# Altium PCB PCB2.PcbDoc
Units mm, origin at the board's own origin, x right, y up, seen from the top; angles counter-clockwise.
Board outline 149.86 x 60.96 mm, 4 copper layers (Top Layer, Int1 (GND), Int2 (PWR), Bottom Layer), stack 1.369 mm thick; 18 components, 20 nets, 163 pads, 36 vias.
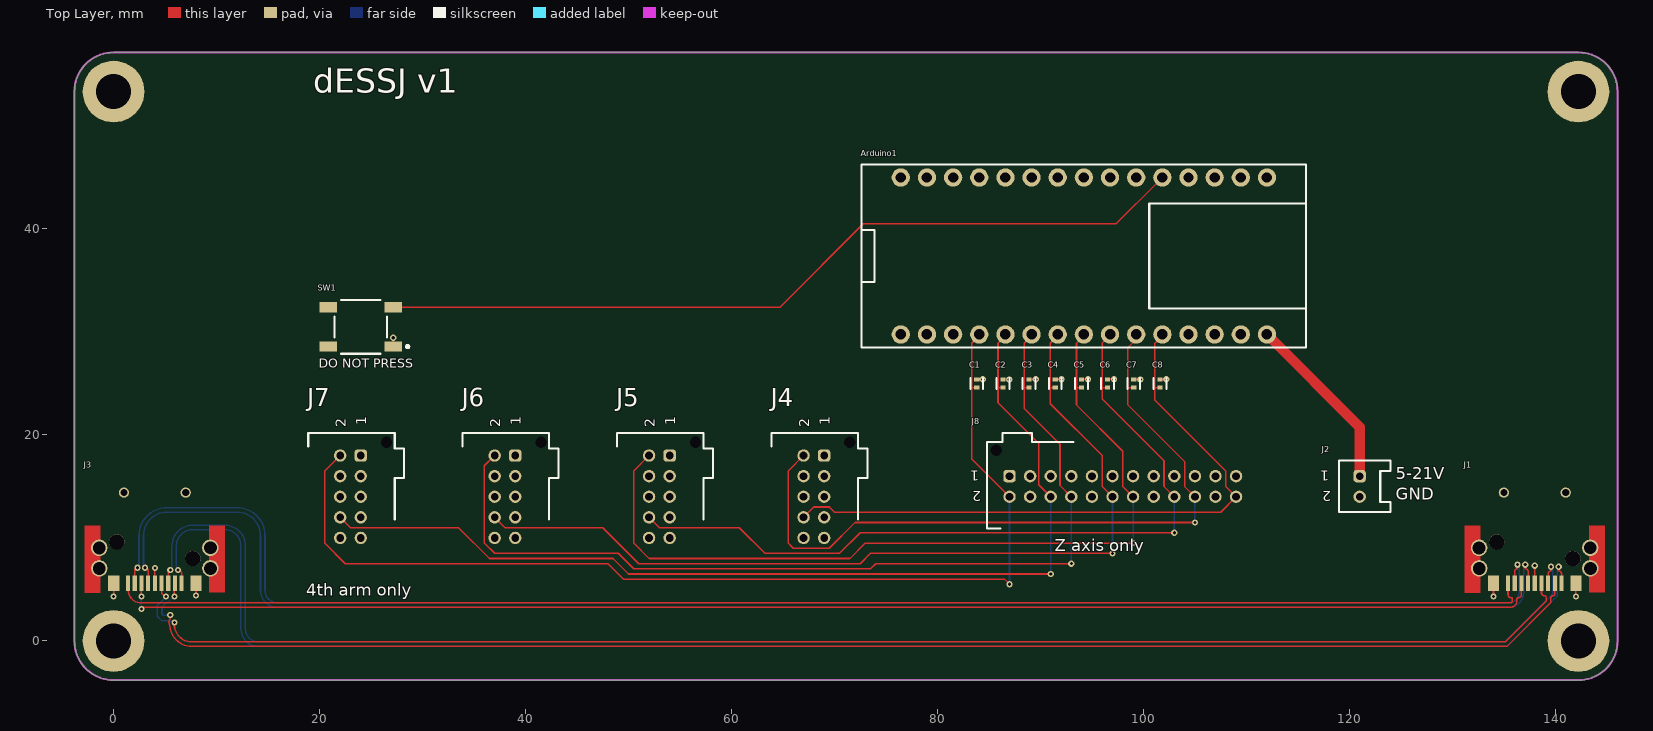
[diagram p0: Top Layer view]
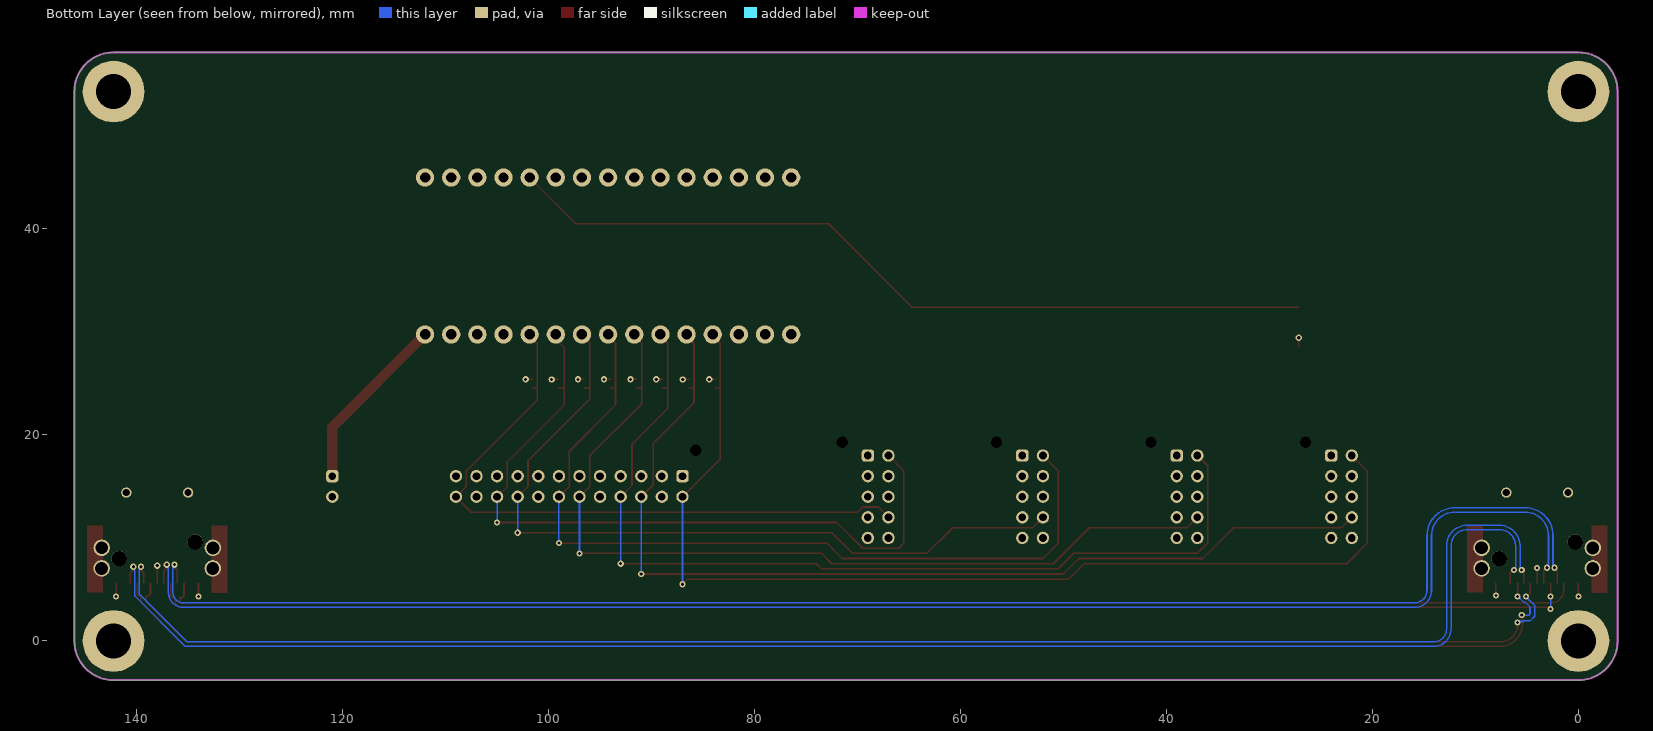
[diagram p1: Bottom Layer view, seen from below]
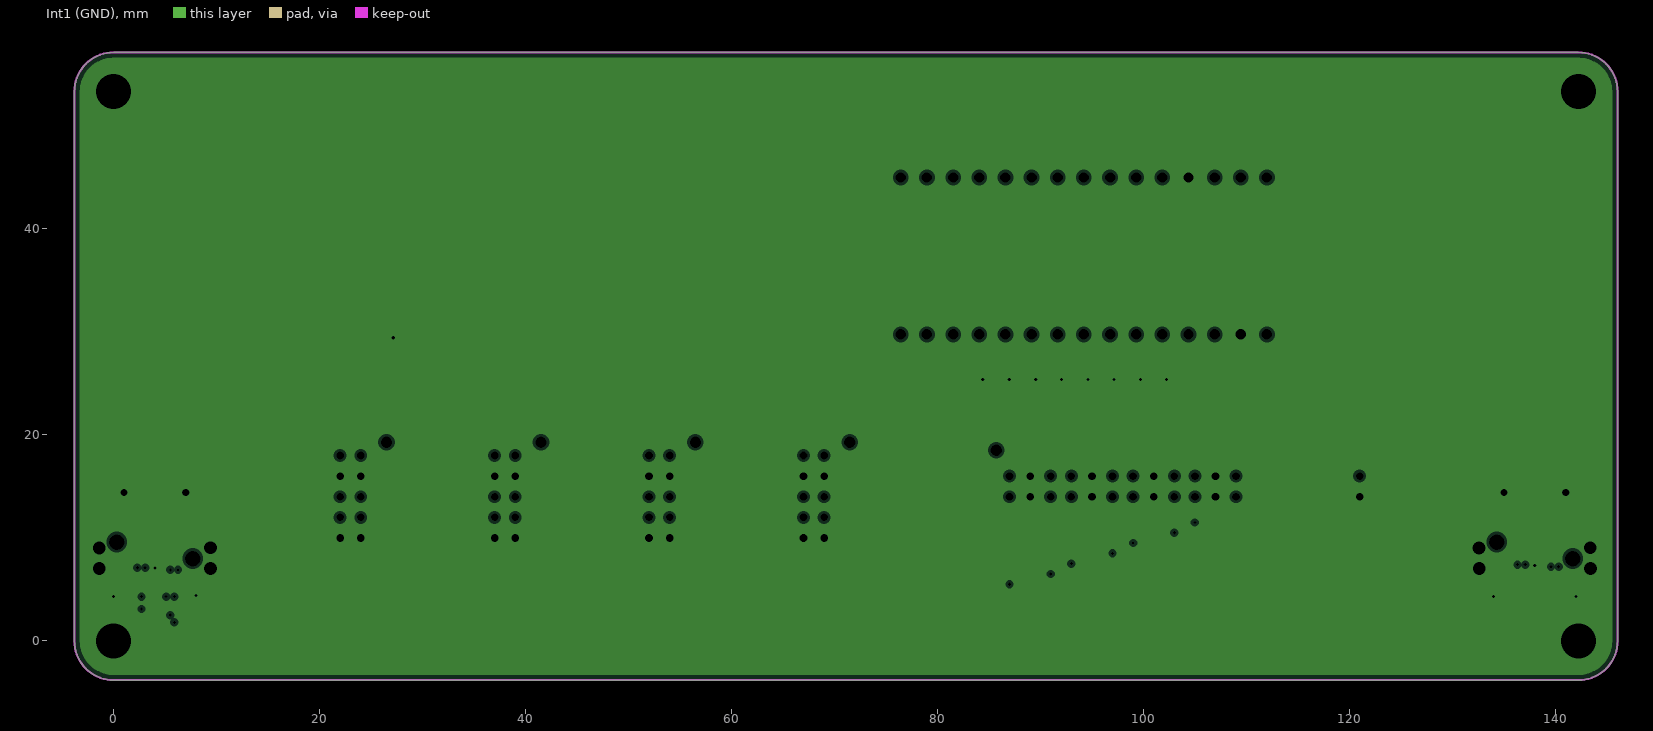
[diagram p2: Int1 (GND), clearances drawn from the general rule]
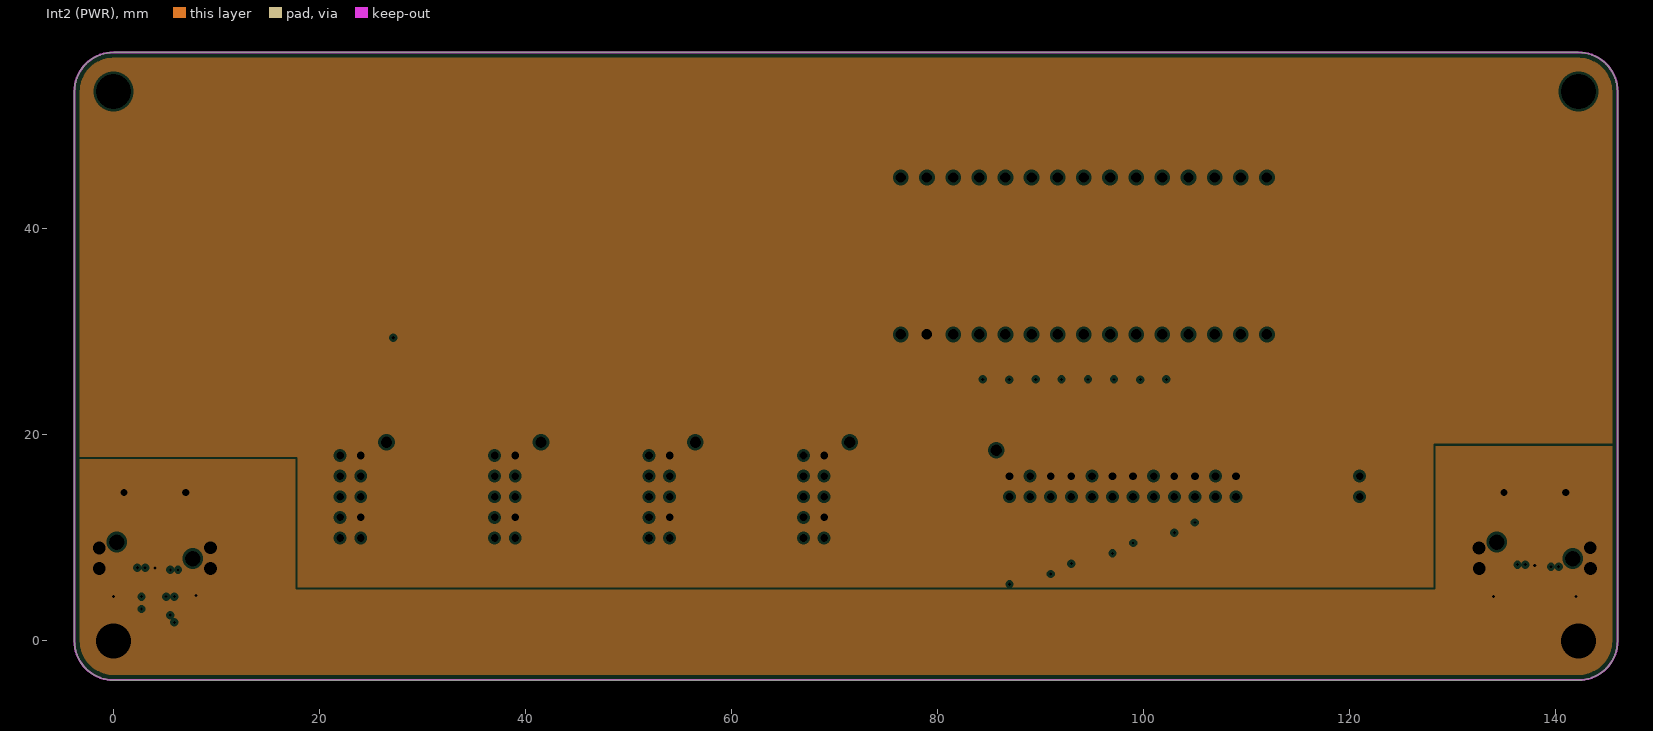
[diagram p3: Int2 (PWR), clearances drawn from the general rule]
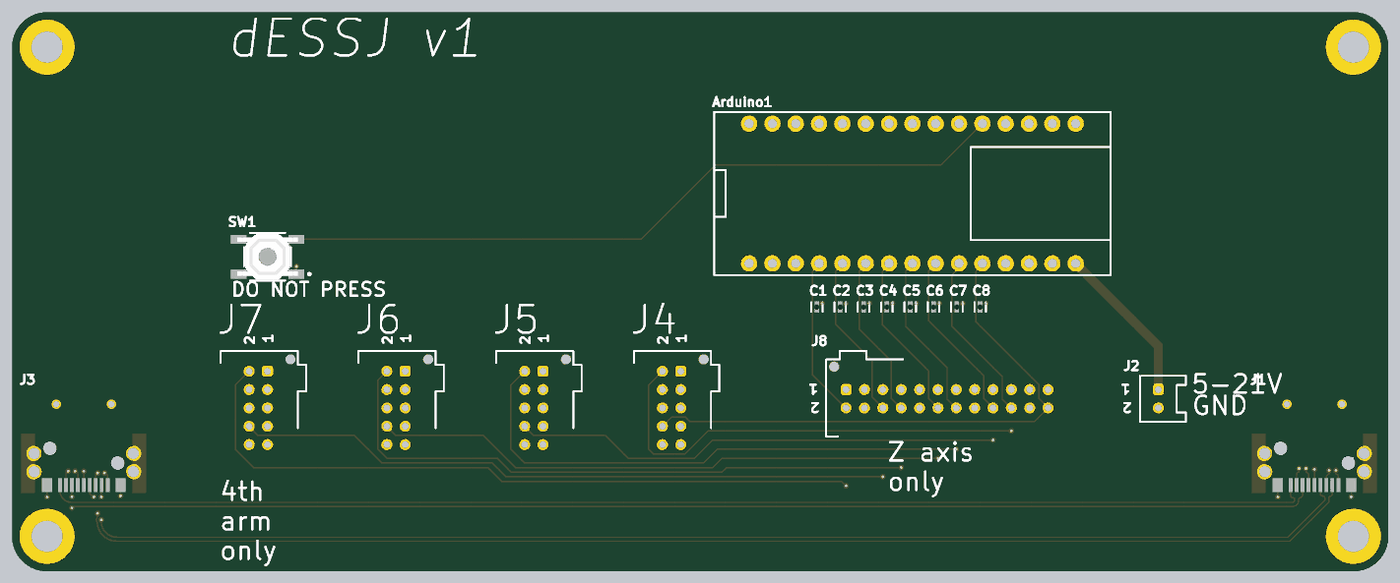
[diagram p4: 3D render of the assembled board from above, using the file's embedded part models]

## Layer stack, top to bottom
Top Solder: solder mask 0.0254, SM-001, Dk 4
Top Layer: signal copper 0.035
Dielectric 1: prepreg 0.1295, PP-017, Dk 4.3
Dielectric 2: prepreg 0.1295, PP-017, Dk 4.3
Int1 (GND): plane copper 0.035, net GND
Dielectric 3: core 0.7112, Core-039, Dk 4.8
Int2 (PWR): plane copper 0.035, net VDDA
Dielectric 4: prepreg 0.1295, PP-017, Dk 4.3
Dielectric 5: prepreg 0.1295, PP-017, Dk 4.3
Bottom Layer: signal copper 0.035
Bottom Solder: solder mask 0.0254, SM-001, Dk 4

## Board outline
-3.81,0 -3.81,53.34 cw(c0,53.34) 0,57.15 142.24,57.15 cw(c142.24,53.34) 146.05,53.34 146.05,0 cw(c142.24,0) 142.24,-3.81 0,-3.81 cw(c0,0)

## Design rules (kind name [scope] priority, off if disabled: settings)
BoardOutlineClearance [All] p1: gap=0.5 ignorepadtopadclearanceinfootprint=FALSE
Clearance Clearance_3 [InComponent('U12')] p1: gap=0.127 ignorepadtopadclearanceinfootprint=TRUE except(0.25: Arc-Hole Track-Hole SMDPad-Hole THPad-Hole Via-Hole Fill-Hole Poly-Hole Region-Hole Text-Hole)
Clearance Clearance_2 [InNetClass('hv')] p2: gap=0.25 ignorepadtopadclearanceinfootprint=TRUE
Clearance Clearance_1 [InPolygon vs OnLayer('Keep-Out Layer')] p3: gap=1 ignorepadtopadclearanceinfootprint=FALSE
Clearance [All] p4: gap=0.152 ignorepadtopadclearanceinfootprint=TRUE except(0.25: Arc-Hole Track-Hole SMDPad-Hole THPad-Hole Via-Hole Fill-Hole Poly-Hole Region-Hole Text-Hole)
ComponentClearance ComponentClearance_1 [HasFootprint('FP-D0008A-IPC_C')] p1: gap=-1000 collisioncheckmode=3 verticalgap=-1000 showdistances=FALSE donotcheckwithout3dbody=TRUE
ComponentClearance [All] p2: gap=0.102 collisioncheckmode=3 verticalgap=0.102 showdistances=TRUE
DiffPairsRouting [All] p1: maxlimit=0.284 minlimit=0.284 mostfreqgap=0.284 toplayer_minwidth=0.152 toplayer_maxwidth=0.152 toplayer_prefwidth=0.152 bottomlayer_minwidth=0.152 bottomlayer_maxwidth=0.152 bottomlayer_prefwidth=0.152 impedanceprofiledriven=TRUE maxuncoupledlength=12.7
Height [All] p1: minheight=0 maxheight=40 prefheight=12.7
HoleSize [All] p1: absolutevalues=TRUE maxlimit=6.3 minlimit=0.2 maxpercent=80.000 minpercent=20.000
HoleToHoleClearance [All] p1: gap=0.25 allowstackedmicrovias=FALSE
MinimumAnnularRing [All] p1: minimumring=0.076
MinimumSolderMaskSliver [All] p1: minsoldermaskwidth=0
PlaneClearance [All] p1: clearance=0.254
PlaneConnect PlaneConnect_1 [HasFootprint('TP_GND')] p1: planeconnectstyle=Direct reliefexpansion=0.508 reliefentries=4 reliefconductorwidth=0.254 reliefairgap=0.254
PlaneConnect PlaneConnectPowerPads [AsMM(Hole) > 3.4] p2: planeconnectstyle=Direct reliefexpansion=0.508 reliefentries=4 reliefconductorwidth=0.254 reliefairgap=0.254
PlaneConnect [All] p3: pad.planeconnectstyle=Relief pad.reliefexpansion=0.305 pad.reliefentries=4 pad.reliefconductorwidth=0.254 pad.reliefairgap=0.254 via.planeconnectstyle=Direct via.reliefexpansion=0.3 via.reliefentries=4 via.reliefconductorwidth=0.127 via.reliefairgap=0.127
PolygonConnect PolygonConnect_2 [HasFootprint('TP_GND')] p1: connectstyle=Direct reliefconductorwidth=0.254 reliefentries=4 polygonreliefangle="90 Angle" airgapwidth=0.254
PolygonConnect PolygonConnect_1 [InComponent('J4') And  Not  InNet('GND')] p2: connectstyle=Direct reliefconductorwidth=0.254 reliefentries=4 polygonreliefangle="90 Angle" airgapwidth=0.254
PolygonConnect PolygonConnectPowerPads [All vs (InPadClass('PowerPads'))] p3 off: connectstyle=Direct reliefconductorwidth=0.254 reliefentries=4 polygonreliefangle="90 Angle" airgapwidth=0.254
PolygonConnect [All] p4: thpad.connectstyle=Relief thpad.reliefconductorwidth=0.254 thpad.reliefentries=4 thpad.polygonreliefangle="90 Angle" thpad.airgapwidth=0.305 smdpad.connectstyle=NoConnect smdpad.reliefconductorwidth=0.102 smdpad.reliefentries=4 smdpad.polygonreliefangle="90 Angle" smdpad.airgapwidth=0.254 via.connectstyle=Direct via.reliefconductorwidth=0.127 via.reliefentries=4 via.polygonreliefangle="90 Angle" via.airgapwidth=0.127
RoutingVias [All] p1: holewidth=0.203 width=0.457 viastyle="Through Hole" minholewidth=0.2 minwidth=0.45 maxholewidth=6.3 maxwidth=6.55
ShortCircuit ShortCircuit_1 [InComponent('F1')] p1: allowed=TRUE
ShortCircuit [All] p2: allowed=FALSE
SilkToSilkClearance [All] p1: silktosilkclearance=0
SilkToSolderMaskClearance [IsPad] p1 off: minsilkscreentomaskgap=0.102 clearancetoexposedcopper=TRUE
SolderMaskExpansion [All] p1: expansion=0.05 istentingtop=FALSE
Width [All] p1: maxlimit=10 minlimit=0.127 preferedwidth=0.152
19 further rules are at their usual default settings.

## Classes and differential pairs
differential pair TDAT: +TDAT_P -TDAT_N
differential pair TCLK: +TCLK_P -TCLK_N
differential pair RDAT: +RDAT_P -RDAT_N
differential pair RCLK: +RCLK_P -RCLK_N

## Components (designator, comment, footprint, x,y, rotation, side; value= is the part's Value field where it differs from the comment)
Arduino1 "arduino_nano33_ble" arduino_nano33_ble 76.44,29.76 r90 top
C1 "GRM155R71C104KA88D" FP-GRM15-MFG 83.82,25 r270 top value=0.10μF
C2 "GRM155R71C104KA88D" FP-GRM15-MFG 86.36,25 r270 top value=0.10μF
C3 "GRM155R71C104KA88D" FP-GRM15-MFG 88.9,25 r270 top value=0.10μF
C4 "GRM155R71C104KA88D" FP-GRM15-MFG 91.44,25 r270 top value=0.10μF
C5 "GRM155R71C104KA88D" FP-GRM15-MFG 93.98,25 r270 top value=0.10μF
C6 "GRM155R71C104KA88D" FP-GRM15-MFG 96.52,25 r270 top value=0.10μF
C7 "GRM155R71C104KA88D" FP-GRM15-MFG 99.06,25 r270 top value=0.10μF
C8 "GRM155R71C104KA88D" FP-GRM15-MFG 101.6,25 r270 top value=0.10μF
J1 "da vinci lvds connector" 1394b 138,10 r270 top
J2 "Header 2" jst_2mm 121,16 r180 top
J3 "da vinci lvds connector" 1394b 4,10 r270 top
J4 "Header 5X2" jst_pad10 69,18 r90 top
J5 "Header 5X2" jst_pad10 54,18 r90 top
J6 "Header 5X2" jst_pad10 39,18 r90 top
J7 "Header 5X2" jst_pad10 24,18 r90 top
J8 "Header 12X2" jst_pad24 87,16 r180 top
SW1 "8-1437565-1" FP-8-1437565-1-MFG 24.007,30.486 r180 top

## Footprints (in the part's own frame and the unit in brackets; to place one, negate y for a bottom-side part, rotate by r counter-clockwise, add the part's x,y. Pads: shape width x height; smd on the part's side, far side on the other; paste and mask are expansions set on the pad)
1394b [mm]
  round 1.5 hole 1.5 unplated: 0(0.401,-3.691) 0(2.007,3.699)
  rect 1.5x0.4 smd mask+0: 1(4.401,2.605) 2(4.401,1.305) 3(4.401,-1.295) 4(4.401,-2.595) 5(4.401,-1.945) 6(4.401,-0.645) 7(4.401,0.005) 8(4.401,0.655) 9(4.401,1.955)
  round 1 hole 0.7 mask+0: 10(-4.403,3.003) 10(-4.403,-2.995)
  round 1.6 hole 1.25: 10(0.959,5.393) 10(0.964,-5.4) 10(2.953,5.4) 10(2.958,-5.393)
  rect 1.5x1.1 smd mask+0: 10(4.398,4.005) 10(4.403,-4.001)
  Top Layer region: -1.205,5.307 5.295,5.307 5.295,6.807 -1.205,6.807
  Top Layer region: -1.2,-5.3 5.3,-5.3 5.3,-6.8 -1.2,-6.8
  body extent -6.09,-6.79 5.01,6.8, height 8
arduino_nano33_ble [mil]
  round 70 hole 40: 1(0,0) 2(0,-100) 3(0,-200) 4(0,-300) 5(0,-400) 6(0,-500) 7(0,-600) 8(0,-700) 9(0,-800) 10(0,-900) 11(0,-1000) 12(0,-1100) 13(0,-1200) 14(0,-1300) 15(0,-1400) 16(600,-1400) 17(600,-1300) 18(600,-1200) 19(600,-1100) 20(600,-1000) 21(600,-900) 22(600,-800) 23(600,-700) 24(600,-600) 25(600,-500) 26(600,-400) 27(600,-300) 28(600,-200) 29(600,-100) 30(600,0)
  silkscreen extent -50,-1550 650,150
FP-8-1437565-1-MFG [mm]
  rect 1.7x1 smd paste+0 mask+0: 1(-3.15,1.9) 2(3.15,1.9) 3(-3.15,-1.9) 4(3.15,-1.9)
  silkscreen extent -4.68,-2.6 2.55,2.6, body extent -4.1,-2.7 4.1,2.7, height 0.25
FP-GRM15-MFG [mm]
  rect 0.4x0.5 smd paste+0 mask+0: 1(-0.4,0) 2(0.4,0)
  silkscreen extent -0.53,-0.63 0.53,0.63, body extent -0.7,-0.38 0.7,0.38, height 0.25
jst_2mm [mm]
  rrect50% 1.2x1.2 hole 0.75: 1(0,0)
  round 1.2 hole 0.75: 2(0,2)
  silkscreen extent -3,-1.5 2,3.5
jst_pad10 [mm]
  round 0 hole 1.1: 0(1.3,-2.5)
  rrect50% 1.2x1.2 hole 0.75: 1(0,0)
  round 1.2 hole 0.75: 2(0,2) 3(-2,0) 4(-2,2) 5(-4,0) 6(-4,2) 7(-6,0) 8(-6,2) 9(-8,0) 10(-8,2)
  silkscreen extent -6.2,-4.2 2.2,5.1
jst_pad24 [mm]
  round 0 hole 1.1: 0(1.3,-2.5)
  rrect50% 1.2x1.2 hole 0.75: 1(0,0)
  round 1.2 hole 0.75: 2(0,2) 3(-2,0) 4(-2,2) 5(-4,0) 6(-4,2) 7(-6,0) 8(-6,2) 9(-8,0) 10(-8,2) 11(-10,0) 12(-10,2) 13(-12,0) 14(-12,2) 15(-14,0) 16(-14,2) 17(-16,0) 18(-16,2) 19(-18,0) 20(-18,2) 21(-20,0) 22(-20,2) 23(-22,0) 24(-22,2)
  silkscreen extent -6.2,-4.2 2.2,5.1

## Part data
C1 C2 C3 C4 C5 C6 C7 C8: library part CMP-2100-03641-2, "CAP CER 0.1UF 16V X7R 0402", Capacitance=0.10μF, Manufacturer=Murata, Package=GRM15, Temperature="-55°C to +125°C", Temperature Characteristic=X7R, Temperature Range High=+125°C, Temperature Range Low=-55°C, Tolerance=10%, Voltage Rating=16Vdc, Category=Cap, ComponentLink2Description=Datasheet, ComponentLink2URL=https://search.murata.co.jp/Ceramy/image/img/A01X/G101/ENG/GRM155R71H471KA01-01A.pdf, Device Class L1="Passive Components", Device Class L2=Capacitors, Device Class L3="Ceramic Capacitors", Digikey Description="CAP CER 0.1UF 16V X7R 0402", Height=0.55mm, Ipc Land Pattern Name=CAPC10050X219, Lead Free=yes, Manufacturer Part Number=GRM155R71C104KA88D, Material=Ceramic, Mouser Description="0402 0.1 uF 16V ±10 % Tolerance X7R SMT Multilayer Ceramic Capacitor", Octopart=https://octopart.com/grm155r71c104ka88d-murata-196880, RoHS=TRUE, Standoff Height=0mm
J1 J3: library part davinci_lvds
J2: "Header, 2-Pin", LatestRevisionDate=17-Jul-2002, LatestRevisionNote="Re-released for DXP Platform.", Publisher="Altium Limited"
J4 J5 J6 J7: "Header, 5-Pin, Dual row", LatestRevisionDate=17-Jul-2002, LatestRevisionNote="Re-released for DXP Platform.", Publisher="Altium Limited"
J8: "Header, 12-Pin, Dual row", LatestRevisionDate=17-Jul-2002, LatestRevisionNote="Re-released for DXP Platform.", Publisher="Altium Limited"
SW1: library part CMP-03407-000016-1, "SWITCH TACTILE SPST-NO 0.02A 15V", Case/Package=SMD/SMT, Contact Current Rating=20mA, Contact Resistance=100mR, Max Operating Temperature=85°C, Max Voltage Rating (DC)=15V, Min Operating Temperature=-35°C, Operating Force=1.57N, Package Quantity=4000, Actuator Length=0.4mm, Actuator Material=Brass, Actuator Type=Standard, Contact Material="Copper Alloy", Contact Plating=Silver, Electrical Life=500000Cycles, ELV=Compliant, Illumination Type=Non-Illuminated, Max Current Rating=20mA, Mechanical Life=500000Cycles, Mount="Surface Mount", Orientation=Straight, Packaging="Tape and Reel", Radiation Hardening=No, RoHS Compliant=Yes, Series=FSMCT, Switch Function=Off-Mom, Switch Travel=0.25mm, Termination="Gull Wing", Throw Configuration=SPST, Type=Switch, Voltage Rating (DC)=15V

## Free pads (board coordinates)
  round 6 hole 3.4: 0(0,0) 0(0,53.34) 0(142.24,0) 0(142.24,53.34)

## Via types
v1: diameter 0.6, hole 0.3, Top Layer to Bottom Layer, tented both sides, 36 vias

## Nets (pads, with @x,y where several pads share a name; then routed paths per layer and width w, separated by ;. In a path a pad name is that pad's centre, name@x,y a point inside that pad or via, vN(x,y) a via of type N, cw(c..) or ccw(c..) an arc to the next point about the centre after c; other vN are vias at no path point)
button: Arduino1.20 SW1.3 | length 79.7
  Top Layer w0.152: SW1.3 64.686,32.386 72.8,40.5 97.34,40.5 101.309,44.469 101.731,44.469 Arduino1.20@101.8,44.4
CH1: Arduino1.11 C8.2 J4.8 J8.24 | length 62.7
  Top Layer w0.152: J4.8 68,13 69.5,13 ; 69.521,13 69.5,13 ; 70.509,12.5 70.57,12.5 ; 101.121,24.596 101.125,24.6 C8.2 ; Arduino1.11@101.5,29.5 101.5,29.277 101.121,28.898 101.121,24.575 101.121,23.379 108,16.5 108,15 J8.24 107.5,12.5 70.57,12.5 ; 69.5,13 70,12.5 70.57,12.5
CH2: Arduino1.10 C7.2 J4.2 J8.20 | length 71.5
  Top Layer w0.152: J4.2 65.5,16.5 65.5,9.5 66,9 69.5,9 72,11.5 v1(105,11.5) ; 98.525,24.6 C7.2 ; Arduino1.10@99.5,29.5 99.48,29.5 98.989,29.009 98.989,28.989 98.5,28.5 98.5,22.914 104,17.414 104,15 J8.20
  Bottom Layer w0.152: v1(105,11.5) J8.20
CH3: Arduino1.9 C6.2 J5.8 J8.18 | length 76.4
  Top Layer w0.152: J5.8 53,11 60.75,11 63.25,8.5 70.5,8.5 72.5,10.5 v1(103,10.5) ; 96.025,24.6 C6.2 ; Arduino1.9@96.5,30 96.5,29.439 96,28.939 96,23.5 102,17.5 102,15 J8.18
  Bottom Layer w0.152: v1(103,10.5) J8.18
CH4: Arduino1.8 C5.2 J5.2 J8.14 | length 82.3
  Top Layer w0.152: J5.2 50.5,16.5 50.5,9.5 52,8 71.5,8 73,9.5 v1(99,9.5) ; C5.2 93.575,24.6 93.5,24.6 ; Arduino1.8@94,30 94,29.399 93.5,28.899 93.5,24.6 ; J8.14 98,15 98,18.414 93.5,22.914 93.5,24.6
  Bottom Layer w0.152: v1(99,9.5) J8.14
CH5: Arduino1.7 C4.2 J6.8 J8.12 | length 86.5
  Top Layer w0.152: J6.8 38,11 47.5,11 51,7.5 72.5,7.5 73.5,8.5 v1(97,8.5) ; 90.975,24.575 91,24.6 C4.2 ; Arduino1.7@91.5,29.5 91.5,29.437 90.961,28.898 90.961,23.039 96,18 96,15 J8.12
  Bottom Layer w0.152: v1(97,8.5) J8.12
CH6: Arduino1.6 C3.2 J6.2 J8.8 | length 92.8
  Top Layer w0.152: J6.2 36,17 36,9.5 37,8.5 49,8.5 50.5,7 73.5,7 74,7.5 v1(93,7.5) ; 88.425,24.6 C3.2 ; Arduino1.6@89,30 89,29.477 88.421,28.898 88.421,22.579 91.9,19.1 91.9,15.1 J8.8
  Bottom Layer w0.152: v1(93,7.5) J8.8@93,14.5
CH7: Arduino1.5 C2.2 J7.8 J8.6 | length 97.6
  Top Layer w0.152: J7.8 23,11 33.5,11 36.5,8 48.5,8 50,6.5 v1(91,6.5) ; 85.9,24.6 C2.2 ; Arduino1.5@86.5,30 86.5,29.517 85.881,28.898 85.881,23.119 89.829,19.171 89.829,15.171 J8.6
  Bottom Layer w0.152: v1(91,6.5) J8.6
CH8: Arduino1.4 C1.2 J7.2 J8.2 | length 104.1
  Top Layer w0.152: J7.2 20.5,16.5 20.5,9.5 22.5,7.5 48,7.5 49.5,6 86.5,6 v1(87,5.5) ; 83.3,24.6 83.341,24.6 ; C1.2 83.341,24.6 ; Arduino1.4@84,30 84,29.557 83.341,28.898 83.341,24.6 ; J8.2 83.341,17.659 83.341,24.6
  Bottom Layer w0.152: v1(87,5.5) J8.2
GND: Arduino1.14 Arduino1.19 C1.1 C2.1 C3.1 C4.1 C5.1 C6.1 C7.1 C8.1 J1.7 J1.10 J2.2 J3.7 J3.10 J4.3 J4.4 J4.9 J4.10 J5.3 J5.4 J5.9 J5.10 J6.3 J6.4 J6.9 J6.10 J7.3 J7.4 J7.9 J7.10 J8.3 J8.4 J8.9 J8.10 J8.15 J8.16 J8.21 J8.22 pad.0 SW1.1 | length 14.2
  Top Layer w0.152: v1(-0.001,4.299) J3.10@-0.001,5.597 ; J3.7 v1(4.005,7.095) ; v1(8.005,4.405) J3.10@8.005,5.602 ; SW1.1 v1(27.157,29.443) ; C1.1 v1(84.4,25.4) ; C2.1 86.372,25.388 86.962,25.388 v1(86.975,25.375) ; C3.1 v1(89.55,25.4) ; C4.1 v1(92.05,25.4) ; C5.1 v1(94.625,25.4) ; C6.1 v1(97.15,25.4) ; C7.1 99.072,25.388 99.687,25.388 v1(99.7,25.375) ; C8.1 v1(102.225,25.4) ; v1(133.999,4.301) J1.10@133.999,5.597 ; J1.7 v1(138.005,7.305) ; v1(142.005,4.305) J1.10@142.005,5.602
RCLK_N: J1.4 J3.4 | length 137.8
  Top Layer w0.152: J3.4 1.405,4.97 ccw(c2.675,4.97) 2.675,3.7 135.632,3.7 ccw(c135.632,3.9) 135.832,3.9 135.832,4.068 ccw(c135.7,4.068) 135.7,4.2 cw(c135.7,4.495) 135.405,4.495 J1.4
RCLK_P: J1.3 J3.3 | length 138.5
  Top Layer w0.152: v1(2.7,3.106) 2.7,3.164 cw(c2.8,3.164) 2.8,3.264 135.632,3.264 ccw(c135.632,3.9) 136.268,3.9 136.268,4.068 cw(c136.4,4.068) 136.4,4.2 ccw(c136.4,4.505) 136.705,4.505 J1.3 ; v1(2.7,4.3) 2.7,5.599 J3.3
  Bottom Layer w0.152: v1(2.7,3.106) v1(2.7,4.3)
RDAT_N: J1.5 J3.5 | length 153.3
  Top Layer w0.152: J3.5 2.055,6.849 cw(c2.306,6.849) v1(2.306,7.1) ; J1.5 136.055,6.755 cw(c136.3,6.755) 136.3,7 ccw(c136.3,7.024) 136.324,7.024 v1(136.324,7.4)
  Bottom Layer w0.152: v1(2.306,7.1) 2.364,7.1 ccw(c2.364,7.2) 2.464,7.2 2.464,10.23 cw(c5.17,10.23) 5.17,12.936 11.994,12.936 cw(c11.994,10.23) 14.7,10.23 14.7,4.9 ccw(c15.9,4.9) 15.9,3.7 135.482,3.7 ccw(c135.482,4.7) 136.482,4.7 136.482,7.242 ccw(c136.324,7.242) v1(136.324,7.4)
RDAT_P: J1.6 J3.6 | length 153.4
  Top Layer w0.152: v1(3.058,7.1) cw(c3.058,6.803) 3.355,6.803 J3.6 ; v1(137.076,7.4) 137.076,7.024 ccw(c137.1,7.024) 137.1,7 cw(c137.1,6.745) 137.355,6.745 J1.6
  Bottom Layer w0.152: v1(3.058,7.1) 3,7.1 cw(c3,7.2) 2.9,7.2 2.9,10.23 cw(c5.17,10.23) 5.17,12.5 11.994,12.5 cw(c11.994,10.23) 14.264,10.23 14.264,4.9 ccw(c15.9,4.9) 15.9,3.264 135.482,3.264 ccw(c135.482,4.7) 136.918,4.7 136.918,7.242 cw(c137.076,7.242) v1(137.076,7.4)
TCLK_N: J1.2 J3.2 | length 155.4
  Top Layer w0.152: J3.2 5.305,6.699 cw(c5.506,6.699) v1(5.506,6.9) ; J1.2 139.305,6.505 cw(c139.6,6.505) 139.6,6.8 139.6,7.174 ccw(c139.574,7.174) v1(139.574,7.2)
  Bottom Layer w0.152: v1(5.506,6.9) ccw(c5.506,7.058) 5.664,7.058 5.664,9.23 cw(c7.67,9.23) 7.67,11.236 10.794,11.236 cw(c10.794,9.23) 12.8,9.23 12.8,1.17 ccw(c14.07,1.17) 14.07,-0.1 135.1,-0.1 139.732,4.532 139.732,7.042 ccw(c139.574,7.042) v1(139.574,7.2)
TCLK_P: J1.1 J3.1 | length 155.6
  Top Layer w0.152: v1(6.258,6.9) cw(c6.258,6.553) 6.605,6.553 J3.1 ; v1(140.326,7.2) ccw(c140.326,7.174) 140.3,7.174 140.3,6.8 cw(c140.3,6.495) 140.605,6.495 J1.1
  Bottom Layer w0.152: v1(6.258,6.9) cw(c6.258,7.058) 6.1,7.058 6.1,9.23 cw(c7.67,9.23) 7.67,10.8 10.794,10.8 cw(c10.794,9.23) 12.364,9.23 12.364,1.17 ccw(c14.07,1.17) 14.07,-0.536 135.281,-0.536 140.168,4.351 140.168,7.042 cw(c140.326,7.042) v1(140.326,7.2)
TDAT_N: J1.8 J3.8 | length 143.8
  Top Layer w0.152: J3.8 4.655,4.621 4.89,4.386 5.014,4.386 v1(5.1,4.3) ; v1(5.9,1.8) 5.9,1.6 ccw(c7.6,1.6) 7.6,-0.1 135.132,-0.1 139.132,3.9 139.132,4.168 ccw(c138.9,4.168) 138.9,4.4 cw(c138.9,4.645) 138.655,4.645 J1.8
  Bottom Layer w0.152: v1(5.1,4.3) 4.233,3.433 4.233,2.396 4.657,1.971 5.281,1.971 5.371,1.881 5.819,1.881 v1(5.9,1.8)
TDAT_P: J1.9 J3.9 | length 144.6
  Top Layer w0.152: v1(5.5,2.5) 5.5,2.197 cw(c5.348,2.198) 5.472,2.11 ccw(c5.9,1.8) 5.447,1.527 cw(c5.317,1.449) 5.469,1.459 ccw(c7.6,1.6) 7.6,-0.536 135.313,-0.536 139.568,3.719 139.568,4.168 cw(c139.8,4.168) 139.8,4.4 ccw(c139.8,4.555) 139.955,4.555 J1.9 ; v1(5.9,4.3) 5.9,5.544 cw(c5.955,5.544) J3.9
  Bottom Layer w0.152: v1(5.5,2.5) 4.789,2.5 4.7,2.589 4.7,3.283 5.188,3.771 5.319,3.771 5.848,4.3 v1(5.9,4.3)
VDD6: Arduino1.15 J2.1 | length 17.5
  Top Layer w1: Arduino1.15 121,20.76 121,16.1 J2.1@121.1,16
VDDA: Arduino1.2 J4.1 J4.7 J5.1 J5.7 J6.1 J6.7 J7.1 J7.7 J8.1 J8.5 J8.7 J8.11 J8.13 J8.17 J8.19 J8.23
pads on no net: Arduino1.1 Arduino1.3 Arduino1.12 Arduino1.13 Arduino1.16 Arduino1.17 Arduino1.18 Arduino1.21 Arduino1.22 Arduino1.23 Arduino1.24 Arduino1.25 Arduino1.26 Arduino1.27 Arduino1.28 Arduino1.29 Arduino1.30 J1.0 J3.0 J4.0 J4.5 J4.6 J5.0 J5.5 J5.6 J6.0 J6.5 J6.6 J7.0 J7.5 J7.6 J8.0 SW1.2 SW1.4

## Polygon pours and split planes (outlines as drawn)
GND on Int1 (GND) (split plane): 142.476,56.633 142.71,56.608 142.942,56.566 143.17,56.508 143.394,56.433 143.612,56.343 143.822,56.238 144.025,56.117 144.219,55.983 144.402,55.835 144.575,55.675 144.735,55.502 144.883,55.319 145.017,55.125 145.138,54.922 145.243,54.712 145.333,54.494 145.408,54.27 145.466,54.042 145.508,53.81 145.533,53.576 145.541,53.355 145.54,53.34 145.54,0 145.541,-0.015 145.533,-0.236 145.508,-0.47 145.466,-0.702 145.408,-0.93 145.333,-1.154 145.243,-1.372 145.138,-1.582 145.017,-1.785 144.883,-1.979 144.735,-2.162 144.575,-2.335 144.402,-2.495 144.219,-2.643 144.025,-2.777 143.822,-2.898 143.612,-3.003 143.394,-3.093 143.17,-3.168 142.942,-3.226 142.71,-3.268 142.476,-3.293 142.255,-3.301 142.24,-3.3 0,-3.3 -0.015,-3.301 -0.236,-3.293 -0.47,-3.268 -0.702,-3.226 -0.93,-3.168 -1.154,-3.093 -1.372,-3.003 -1.582,-2.898 -1.785,-2.777 -1.979,-2.643 -2.162,-2.495 -2.335,-2.335 -2.495,-2.162 -2.643,-1.979 -2.777,-1.785 -2.898,-1.582 -3.003,-1.372 -3.093,-1.154 -3.168,-0.93 -3.226,-0.702 -3.268,-0.47 -3.293,-0.236 -3.301,-0.015 -3.3,0 -3.3,53.34 -3.301,53.355 -3.293,53.576 -3.268,53.81 -3.226,54.042 -3.168,54.27 -3.093,54.494 -3.003,54.712 -2.898,54.922 -2.777,55.125 -2.643,55.319 -2.495,55.502 -2.335,55.675 -2.162,55.835 -1.979,55.983 -1.785,56.117 -1.582,56.238 -1.372,56.343 -1.154,56.433 -0.93,56.508 -0.702,56.566 -0.47,56.608 -0.236,56.633 -0.015,56.641 0,56.64 142.24,56.64 142.255,56.641
GND on Int2 (PWR) (split plane): 145.54,0 145.541,-0.015 145.533,-0.236 145.508,-0.47 145.466,-0.702 145.408,-0.93 145.333,-1.154 145.243,-1.372 145.138,-1.582 145.017,-1.785 144.883,-1.979 144.735,-2.162 144.575,-2.335 144.402,-2.495 144.219,-2.643 144.025,-2.777 143.822,-2.898 143.612,-3.003 143.394,-3.093 143.17,-3.168 142.942,-3.226 142.71,-3.268 142.476,-3.293 142.255,-3.301 142.24,-3.3 0,-3.3 -0.015,-3.301 -0.236,-3.293 -0.47,-3.268 -0.702,-3.226 -0.93,-3.168 -1.154,-3.093 -1.372,-3.003 -1.582,-2.898 -1.785,-2.777 -1.979,-2.643 -2.162,-2.495 -2.335,-2.335 -2.495,-2.162 -2.643,-1.979 -2.777,-1.785 -2.898,-1.582 -3.003,-1.372 -3.093,-1.154 -3.168,-0.93 -3.226,-0.702 -3.268,-0.47 -3.293,-0.236 -3.301,-0.015 -3.3,0 -3.3,17.678 17.678,17.678 17.678,5.08 17.686,5.041 17.708,5.008 17.741,4.986 17.78,4.978 128.27,4.978 128.309,4.986 128.342,5.008 128.364,5.041 128.372,5.08 128.372,18.948 145.54,18.948
VDDA on Int2 (PWR) (split plane): 142.476,56.633 142.71,56.608 142.942,56.566 143.17,56.508 143.394,56.433 143.612,56.343 143.822,56.238 144.025,56.117 144.219,55.983 144.402,55.835 144.575,55.675 144.735,55.502 144.883,55.319 145.017,55.125 145.138,54.922 145.243,54.712 145.333,54.494 145.408,54.27 145.466,54.042 145.508,53.81 145.533,53.576 145.541,53.355 145.54,53.34 145.54,19.152 128.27,19.152 128.231,19.144 128.198,19.122 128.176,19.089 128.168,19.05 128.168,5.182 17.882,5.182 17.882,17.78 17.874,17.819 17.852,17.852 17.819,17.874 17.78,17.882 -3.3,17.882 -3.3,53.34 -3.301,53.355 -3.293,53.576 -3.268,53.81 -3.226,54.042 -3.168,54.27 -3.093,54.494 -3.003,54.712 -2.898,54.922 -2.777,55.125 -2.643,55.319 -2.495,55.502 -2.335,55.675 -2.162,55.835 -1.979,55.983 -1.785,56.117 -1.582,56.238 -1.372,56.343 -1.154,56.433 -0.93,56.508 -0.702,56.566 -0.47,56.608 -0.236,56.633 -0.015,56.641 0,56.64 142.24,56.64 142.255,56.641

## Keep-outs
Keep-Out Layer:
  the board outline again, w0.2

## Other copper
Int2 (PWR) (plane layer: these items are gaps in the copper):
  lines w0.2: -3.81,17.78 17.78,17.78 17.78,5.08 128.27,5.08 128.27,19.05 146.05,19.05

## Silkscreen, mask and mechanical layers (free items; w line width, h text height)
Top Overlay:
  text "dESSJ v1" at 19.4,52.43 h4
  text "DO NOT PRESS" at 19.9,26.214 h1.5
  text "5-21V" at 124.5,15.3 h2
  text "GND" at 124.5,13.319 h2
  text "Z axis only" at 91.4,8.3 h2
  text "4th arm only" at 18.7,4 h2

## Text inside footprints (layer, text, board x,y; h text height)
J2: Top Overlay "1" at 118.046,16.546 h1 r180; Top Overlay "2" at 118.246,14.546 h1 r180
J4: Top Overlay "1" at 69.546,20.954 h1 r90; Top Overlay "2" at 67.546,20.754 h1 r90
J5: Top Overlay "1" at 54.546,20.954 h1 r90; Top Overlay "2" at 52.546,20.754 h1 r90
J6: Top Overlay "1" at 39.546,20.954 h1 r90; Top Overlay "2" at 37.546,20.754 h1 r90
J7: Top Overlay "1" at 24.546,20.954 h1 r90; Top Overlay "2" at 22.546,20.754 h1 r90
J8: Top Overlay "1" at 84.046,16.546 h1 r180; Top Overlay "2" at 84.246,14.546 h1 r180